# Altium PCB Handheld_REV1.PcbDoc (part 2 of 2)
Units mm, origin at the board's own origin, x right, y up, seen from the top; angles counter-clockwise.
Board outline 85 x 55 mm, 4 copper layers (Top Layer, Mid-Layer 1, Mid-Layer 2, Bottom Layer); 260 components, 237 nets, 1189 pads, 85 vias.
Unrouted connection lines stored in the file: 656.
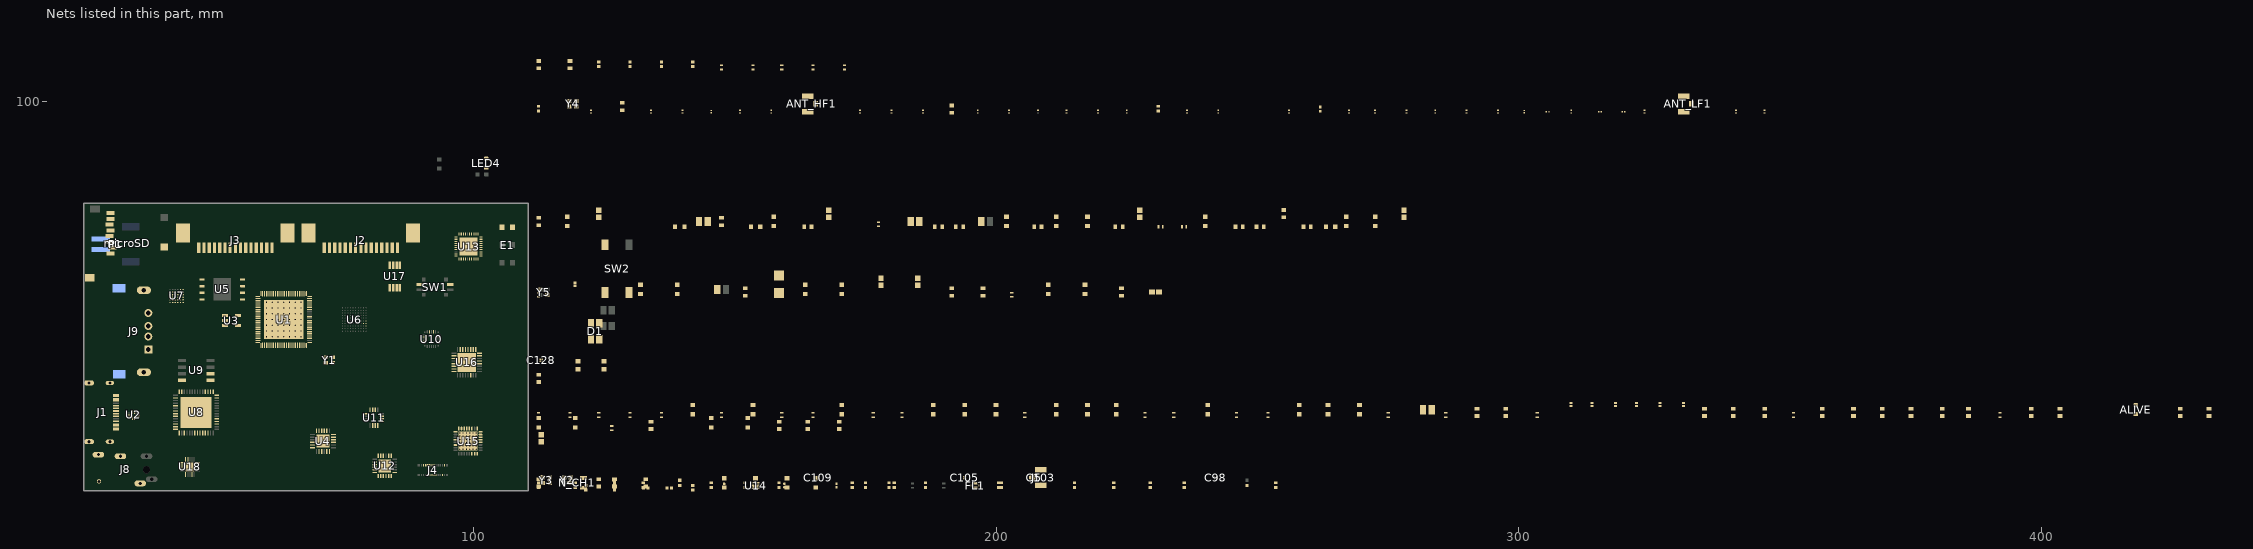
[diagram p4: the nets of this part, all layers, seen from the top]

## Footprints (in the part's own frame and the unit in brackets; to place one, negate y for a bottom-side part, rotate by r counter-clockwise, add the part's x,y. Pads: shape width x height; smd on the part's side, far side on the other; paste and mask are expansions set on the pad) (continued)
SON127P600X800X80-9N [mm]
  rrect25% 0.94x0.44 smd: 1(-3.895,1.905) 2(-3.895,0.635) 3(-3.895,-0.635) 4(-3.895,-1.905) 5(3.895,-1.905) 6(3.895,-0.635) 7(3.895,0.635) 8(3.895,1.905)
  rect 3.4x4.3 smd paste-3: 9(0,0)
  silkscreen extent -5.1,-3 4,3, body extent -4,-3 4,3, height 0.8
SOP65P490X110-8N [mm]
  rrect25% 1.47x0.48 smd: 1(-2.15,0.975) 2(-2.15,0.325) 3(-2.15,-0.325) 4(-2.15,-0.975) 5(2.15,-0.975) 6(2.15,-0.325) 7(2.15,0.325) 8(2.15,0.975)
  silkscreen extent -3.62,-1.54 1.5,1.54, body extent -2.45,-1.5 2.45,1.5, height 1.1
SOT95P280X145-5N [mm]
  rrect50% 1.21x0.59 smd: 1(-1.255,0.95) 2(-1.255,0) 3(-1.255,-0.95) 4(1.255,-0.95) 5(1.255,0.95)
  silkscreen extent -2.51,-1.45 0.8,1.45, body extent -1.4,-1.45 1.4,1.45, height 1.45
TDK_DPX165950DT-8148A1 [mm]
  rrect33% 0.6x0.3 smd: 1(-0.45,0.55) 2(-0.45,0) 3(-0.45,-0.55) 4(0.45,-0.55) 5(0.45,0) 6(0.45,0.55)
  silkscreen extent -0.4,1 -0.1,1.2, body extent -0.47,-0.88 0.48,0.87, height 0.7
"TE connectivity part no. 2-1437565-8" [mm] "Tactile switch (pushbutton)"
  rect 1.3x2.1 smd: 1(-2.3,4.55) 2(-2.3,-4.55) 3(2.3,4.55) 4(2.3,-4.55)
  body extent -3.05,-4.5 2.95,4.5, height 4.3
TE_1-84952-5 [mm]
  rect 0.61x2 smd: 1(-7,0) 2(-6,0) 3(-5,0) 4(-4,0) 5(-3,0) 6(-2,0) 7(-1,0) 8(0,0) 9(1,0) 10(2,0) 11(3,0) 12(4,0) 13(5,0) 14(6,0) 15(7,0)
  rect 2.68x3.6 smd: S1(-9.99,-2.8) S2(9.99,-2.8)
  silkscreen extent -11.46,-6.4 11.46,0.27, body extent -11.46,-5.6 11.46,0.94, height 2.54
TENSILITY_54-00176 [mm]
  oval 1.108x2.216 hole 0.6 square: 1(2.9,-4.7) 3(2.6,-0.5) 4(-2.6,3.3) 5(-1.8,5.5) 6(2.6,4.5)
  round 0.8 hole 0.6 mask+0: 2(-2.2,-4.6)
  round 1.4 hole 1.4 unplated: ""(0,4.5)
  Top Layer region: -1.89,-3.751 -1.884,-3.751 -1.879,-3.752 -1.874,-3.753 -1.869,-3.755 -1.864,-3.757 -1.859,-3.759 -1.855,-3.761 -1.85,-3.763 -1.846,-3.766 -1.841,-3.769 -1.837,-3.772 -1.833,-3.776 -1.829,-3.779 -1.826,-3.783 -1.822,-3.787 -1.819,-3.791 -1.816,-3.796 -1.813,-3.8 -1.811,-3.805 -1.809,-3.809 -1.807,-3.814 -1.805,-3.819 -1.803,-3.824 -1.802,-3.829 -1.801,-3.834 -1.801,-3.84 -1.8,-3.845 -1.8,-3.85 -1.8,-5.35 -1.8,-5.355 -1.801,-5.36 -1.801,-5.366 -1.802,-5.371 -1.803,-5.376 -1.805,-5.381 -1.807,-5.386 -1.809,-5.391 -1.811,-5.395 -1.813,-5.4 -1.816,-5.404 -1.819,-5.409 -1.822,-5.413 -1.826,-5.417 -1.829,-5.421 -1.833,-5.424 -1.837,-5.428 -1.841,-5.431 -1.846,-5.434 -1.85,-5.437 -1.855,-5.439 -1.859,-5.441 -1.864,-5.443 -1.869,-5.445 -1.874,-5.447 -1.879,-5.448 -1.884,-5.449 -1.89,-5.449 -1.895,-5.45 -2.505,-5.45 -2.51,-5.449 -2.516,-5.449 -2.521,-5.448 -2.526,-5.447 -2.531,-5.445 -2.536,-5.443 -2.541,-5.441 -2.545,-5.439 -2.55,-5.437 -2.554,-5.434 -2.559,-5.431 -2.563,-5.428 -2.567,-5.424 -2.571,-5.421 -2.574,-5.417 -2.578,-5.413 -2.581,-5.409 -2.584,-5.404 -2.587,-5.4 -2.589,-5.395 -2.591,-5.391 -2.593,-5.386 -2.595,-5.381 -2.597,-5.376 -2.598,-5.371 -2.599,-5.366 -2.599,-5.36 -2.6,-5.355 -2.6,-5.35 -2.6,-3.85 -2.6,-3.845 -2.599,-3.84 -2.599,-3.834 -2.598,-3.829 -2.597,-3.824 -2.595,-3.819 -2.593,-3.814 -2.591,-3.809 -2.589,-3.805 -2.587,-3.8 -2.584,-3.796 -2.581,-3.791 -2.578,-3.787 -2.574,-3.783 -2.571,-3.779 -2.567,-3.776 -2.563,-3.772 -2.559,-3.769 -2.554,-3.766 -2.55,-3.763 -2.545,-3.761 -2.541,-3.759 -2.536,-3.757 -2.531,-3.755 -2.526,-3.753 -2.521,-3.752 -2.516,-3.751 -2.51,-3.751 -2.505,-3.75 -1.895,-3.75
  Bottom Layer region: -1.89,-3.751 -1.884,-3.751 -1.879,-3.752 -1.874,-3.753 -1.869,-3.755 -1.864,-3.757 -1.859,-3.759 -1.855,-3.761 -1.85,-3.763 -1.846,-3.766 -1.841,-3.769 -1.837,-3.772 -1.833,-3.776 -1.829,-3.779 -1.826,-3.783 -1.822,-3.787 -1.819,-3.791 -1.816,-3.796 -1.813,-3.8 -1.811,-3.805 -1.809,-3.809 -1.807,-3.814 -1.805,-3.819 -1.803,-3.824 -1.802,-3.829 -1.801,-3.834 -1.801,-3.84 -1.8,-3.845 -1.8,-3.85 -1.8,-5.35 -1.8,-5.355 -1.801,-5.36 -1.801,-5.366 -1.802,-5.371 -1.803,-5.376 -1.805,-5.381 -1.807,-5.386 -1.809,-5.391 -1.811,-5.395 -1.813,-5.4 -1.816,-5.404 -1.819,-5.409 -1.822,-5.413 -1.826,-5.417 -1.829,-5.421 -1.833,-5.424 -1.837,-5.428 -1.841,-5.431 -1.846,-5.434 -1.85,-5.437 -1.855,-5.439 -1.859,-5.441 -1.864,-5.443 -1.869,-5.445 -1.874,-5.447 -1.879,-5.448 -1.884,-5.449 -1.89,-5.449 -1.895,-5.45 -2.505,-5.45 -2.51,-5.449 -2.516,-5.449 -2.521,-5.448 -2.526,-5.447 -2.531,-5.445 -2.536,-5.443 -2.541,-5.441 -2.545,-5.439 -2.55,-5.437 -2.554,-5.434 -2.559,-5.431 -2.563,-5.428 -2.567,-5.424 -2.571,-5.421 -2.574,-5.417 -2.578,-5.413 -2.581,-5.409 -2.584,-5.404 -2.587,-5.4 -2.589,-5.395 -2.591,-5.391 -2.593,-5.386 -2.595,-5.381 -2.597,-5.376 -2.598,-5.371 -2.599,-5.366 -2.599,-5.36 -2.6,-5.355 -2.6,-5.35 -2.6,-3.85 -2.6,-3.845 -2.599,-3.84 -2.599,-3.834 -2.598,-3.829 -2.597,-3.824 -2.595,-3.819 -2.593,-3.814 -2.591,-3.809 -2.589,-3.805 -2.587,-3.8 -2.584,-3.796 -2.581,-3.791 -2.578,-3.787 -2.574,-3.783 -2.571,-3.779 -2.567,-3.776 -2.563,-3.772 -2.559,-3.769 -2.554,-3.766 -2.55,-3.763 -2.545,-3.761 -2.541,-3.759 -2.536,-3.757 -2.531,-3.755 -2.526,-3.753 -2.521,-3.752 -2.516,-3.751 -2.51,-3.751 -2.505,-3.75 -1.895,-3.75
  Keep-Out Layer board cut-out: -1.65,-4.8 -1.65,-6 1.65,-6 1.65,-4.8
  silkscreen extent -3.15,-6 4.35,6, body extent -3.15,-8 3.15,6, height 4.35
"U.FL-R-SMT Hirose_2337019-1" [mm] "Hirose U.FL RF receptacle - U.FL-R-SMT"
  rect 1x0.95 smd paste+0 mask+0.025: 1(0,-1.5)
  rect 1.05x2.2 smd paste+0 mask+0.025: 2(1.475,0) 3(-1.475,0)
  Top Layer pour cut-out: -0.875,-0.9 -0.875,1.1 0.875,1.1 0.875,-0.9
  Mid-Layer 1 pour cut-out: -0.875,-0.9 -0.875,1.1 0.875,1.1 0.875,-0.9
  Mid-Layer 2 pour cut-out: -0.875,-0.9 -0.875,1.1 0.875,1.1 0.875,-0.9
  silkscreen extent -0.9,-1.9 -0.7,-1.7, body extent -1.5,-1.55 1.5,1.55, height 1.2
VFQFPN32_5X5_WETTABLE_STM-M [mil]
  rect 36x10 smd paste+0 mask+0: 1(-96.5,68.9) 2(-96.5,49.21) 3(-96.5,29.53) 4(-96.5,9.84) 5(-96.5,-9.84) 6(-96.5,-29.53) 7(-96.5,-49.21) 8(-96.5,-68.9) 17(96.5,-68.9) 18(96.5,-49.21) 19(96.5,-29.53) 20(96.5,-9.84) 21(96.5,9.84) 22(96.5,29.53) 23(96.5,49.21) 24(96.5,68.9)
  rect 10x36 smd paste+0 mask+0: 9(-68.9,-96.5) 10(-49.21,-96.5) 11(-29.53,-96.5) 12(-9.84,-96.5) 13(9.84,-96.5) 14(29.53,-96.5) 15(49.21,-96.5) 16(68.9,-96.5) 25(68.9,96.5) 26(49.21,96.5) 27(29.53,96.5) 28(9.84,96.5) 29(-9.84,96.5) 30(-29.53,96.5) 31(-49.21,96.5) 32(-68.9,96.5)
  rect 142x142 smd paste-71 mask+0: 33(0,0)
  silkscreen extent -104,-134 134,134, body extent -99,-99 99,99, height 39
VQFN-56Y856_FTD-M [mil]
  rect 36x10 smd paste+0 mask+0: 1(-155.5,127.95) 2(-155.5,108.27) 3(-155.5,88.58) 4(-155.5,68.9) 5(-155.5,49.21) 6(-155.5,29.53) 7(-155.5,9.84) 8(-155.5,-9.84) 9(-155.5,-29.53) 10(-155.5,-49.21) 11(-155.5,-68.9) 12(-155.5,-88.58) 13(-155.5,-108.27) 14(-155.5,-127.95) 29(155.5,-127.95) 30(155.5,-108.27) 31(155.5,-88.58) 32(155.5,-68.9) 33(155.5,-49.21) 34(155.5,-29.53) 35(155.5,-9.84) 36(155.5,9.84) 37(155.5,29.53) 38(155.5,49.21) 39(155.5,68.9) 40(155.5,88.58) 41(155.5,108.27) 42(155.5,127.95)
  rect 10x36 smd paste+0 mask+0: 15(-127.95,-155.5) 16(-108.27,-155.5) 17(-88.58,-155.5) 18(-68.9,-155.5) 19(-49.21,-155.5) 20(-29.53,-155.5) 21(-9.84,-155.5) 22(9.84,-155.5) 23(29.53,-155.5) 24(49.21,-155.5) 25(68.9,-155.5) 26(88.58,-155.5) 27(108.27,-155.5) 28(127.95,-155.5) 43(127.95,155.5) 44(108.27,155.5) 45(88.58,155.5) 46(68.9,155.5) 47(49.21,155.5) 48(29.53,155.5) 49(9.84,155.5) 50(-9.84,155.5) 51(-29.53,155.5) 52(-49.21,155.5) 53(-68.9,155.5) 54(-88.58,155.5) 55(-108.27,155.5) 56(-127.95,155.5)
  rect 234x234 smd paste-117 mask+0: 57(0,0)
  silkscreen extent -194,-194 194,194, body extent -157,-157 157,157, height 35
WL-SFCW_1206 [mm] "SMT Full-color Chip LED Waterclear, body 3.20 x 1.60mm"
  rect 1.6x1.2 smd: 1(-1.5,0.8) 2(-1.5,-0.8) 3(1.5,-0.8) 4(1.5,0.8)
  silkscreen extent -2.85,-0.85 -2.65,-0.65, body extent -1.6,-0.8 1.6,0.8, height 0.7
XTAL_ECS-400-10-37B2-CKM-TR [mm]
  rect 0.85x0.75 smd: 1(-0.675,-0.525) 2(0.675,-0.525) 3(0.675,0.525) 4(-0.675,0.525)
  silkscreen extent -0.77,-1.62 -0.58,-1.43, body extent -1,-0.8 1,0.8, height 0.5

## Part data
ALIVE: library part CMP-004-00003-1, "0603LED-Green", Component Type=Standard, Design Item ID=CMP-001-C10-9, Pin Count=2, Source="Components - 10.10.25 - 00.17.SchLib"
ANT_HF1 ANT_LF1: "U.FL Hirose RF Connector", LatestRevisionDate="21-Feb-2012  -  Semtech"
C1 C3 C4 C9 C96 C122 C123: library part "CAP-47uF-6.3V 0805", "T529, Tantalum, Polymer Tantalum, Reduced Volume, 47 uF, 20%, 6.3 VDC, SMD, Polymer, Substrate, 150 mOhms, 2012, Height Max = 1mm", Manufacturer_Name=Kemet, Copyright="Copyright (C) 2025 Ultra Librarian. All rights reserved.", Datasheet=https://content.kemet.com/datasheets/KEM_T2076_T52X-530.pdf, Manufacturer_Part_Number=T529P476M006AAE150
C2 C8 C10: library part CMP-001-C31-8, "22pF, 10V, 1%, NP0, 0603"
C5 C11 C12 C13 C14 C15 C16 C18 C19 C25 C26 C31 C32 C33 C35 C36 C39 C42 C44 C52 C53 C54 C55 C114 C115 C117 C118 C119 C120 C124 C125 C126: library part CMP-001-B36-7, "10uF, 16V, 20%, X5R, 0603"
C6 C7 C116 C121: library part CMP-00017-A.2, "100nF 16V"
C17 C20 C21 C22 C23 C24 C27 C28 C29 C30 C34 C37 C38 C40 C41 C43 C45 C46 C47 C48 C49 C50 C51 C56 C57 C58 C59 C60 C61 C127: library part CMP-00017-A.2
C62 C63 C129 C130: library part CMP-00397-1, "6.8pF, 50V, 10%, 0402", Voltage Rating (DC)=50V
C64 C66 C71 C99 C101 C106 C111 C112: library part CMP-00396-1, "10pF, 50V, 10%, 0402", Voltage Rating (DC)=50V
C65: library part CMP-0064968-1, "CAP, CERM, 8.2 pF, 25 V,+/- 1.2%, C0G/NP0, 0201", Cap_Case=0201, Manufacturer=MuRata, PartNumber=GRM0335C1E8R2BA01D, TempCo=C0G/NP0, Tolerance_%=1.2%, Value1=Unknown, Value2=25V, ValueDisplayed=8.2pF, AEC Category=Q200, AEC Grade=N/A, AEC Qualified=N, Cap_F=8.2pF, ComponentLink1Description="Datasheet link", ComponentLink1URL=http://search.murata.co.jp/Ceramy/image/img/A01X/G101/ENG/GRM0335C1E8R2BA01-01.pdf, CompType=Capacitor, LatestRevisionDate=2017-06-05, MountType=SMT, PackageReference=0201, Polarized=N, Published=2008-06-19, Publisher="Texas Instruments", RoHS=Y, SizeArea_mm2=0.18, SizeAreaWB_mm2=2.08, SizeX_mm=0.6, SizeY_mm=0.3, SizeZ_mm=0.26, Supplier 1=Digi-Key, Supplier 2=Mouser, Supplier Part Number 1=GRM0335C1E8R2BA01D, Supplier Part Number 2=81-GRM0335C1E8R2BA1D, TaMax_C=125°C, TaMin_C=-55°C, Technology=Ceramic, U/M=EA, VDC_V=25V
C67 C68 C69 C70 C86 C95: library part CMP-001-P41-1, "2.2uF, 35V, 10%, 0402"
C72 C73 C74: library part CMP-00395-1, "3.9pF, 50V, 10%, 0402", Voltage Rating (DC)=50V
C75 C76 C77 C78 C79 C80 C81 C82 C83 C84 C85 C87 C88 C89 C90 C91 C92 C93 C94: "Capacitor SMD", LatestRevisionDate="05-oct-2007  -  Semtech", LatestRevisionNote="Re-released for DXP Platform.", Published=8-Jun-2000, Publisher="Altium Limited"
C97 C113: library part CMP-00399-1, "50V 33pF C0G ±1% 0402 Multilayer Ceramic Capacitors MLCC - SMD/SMT ROHS", Case/Package=0402, Max Operating Temperature=125°C, Min Operating Temperature=-55°C, Tolerance=1%, Voltage Rating=50V, Voltage Rating (DC)=50V
C98 C103 C105 C109 C128: library part LXRW0YV600, "Variable capacitor 30-60pF", Supplier Part Number 1=490-18379-1-ND, Supplier 1=DigiKey
C100 C104 C107 C110: library part CMP-001-O95-2, "100pF, 50V, Tolerance, Temperature, 0402"
C102 C108: library part CMP-00398-1, "Ceramic Capacitor, Multilayer, Ceramic, 50V, 1% +Tol, 1% -Tol, C0G, 30ppm/Cel TC, 0.00068uF, Surface Mount, 0402", Max Operating Temperature=125°C, Min Operating Temperature=-55°C, Tolerance=1%, Voltage Rating=50V, Voltage Rating (DC)=50V
D1: library part CMP-004-00000-1, "Led, Red/Green/Blue, 360Mcd/1Cd/350Mcd Rohs Compliant: Yes", Forward Current=100mA, Forward Voltage=2V, Max Operating Temperature=85°C, Max Reverse Voltage (DC)=5V, Min Operating Temperature=-40°C, Power Dissipation=65mW, Dominant Wavelength=525nm, Height=700µm, Length=3.2mm, Luminous Intensity=350mcd, Peak Wavelength=468nm, RoHS=Compliant, Viewing Angle=120°, Width=1.6mm
D2: library part CMP-001-M81-1, "1206 RGB LED Wurth"
D3 D4 D5 D6 D7 D8 D12 D13 D14: "TVS DIODE 3.3V, DFN1006-2, 13pF @ 1MHz", Manufacturer_Name="Diodes Inc", Copyright="Copyright (C) 2025 Ultra Librarian. All rights reserved.", Manufacturer_Part_Number=DESD3V3E1BL-7B, RefDes=RefDes, Type=Type
D9 D10: "Ultra Low Capacitance 1-line ESD Protection", LatestRevisionDate=23-Aug-2016, Type="TVS Diode"
E1: library part CMP-0001857-1, "WLAN ANTENNA 802.11, SMD", Alternate Manufacturer=----, Manufacturer=Ethertronics, Alternate PartNumber=----, ComponentLink1Description="Datasheet URL", ComponentLink1URL=http://www.ethertronics.com/files/6014/0708/4228/Savvi_WLAN__8x3_M830510.pdf, CompType=Antenna, LatestRevisionDate=09/03/2017, MountType=SMT, PackageReference=8x3mm, PartNumber=M830520, Publisher="Texas Instruments", RoHS=Y, SizeArea_mm2=24, SizeAreaWB_mm2=50, SizeX_mm=3, SizeY_mm=8, SizeZ_mm=1.33
FB1: library part CMP-001-N50.0.3, "Ferrite Bead, 26 Ohm @ 100 MHz, 6A, 7mOhm", Case Code=0603, Current Rating=6A, DC Resistance-Max=7mR, Max Frequency=100MHz, Max Operating Temperature=125°C, Min Operating Temperature=-55°C, Construction="Chip Bead", Filter Type="FERRITE CHIP", Height=0.5mm, JESD-609 Code=e3, Length=1.6mm, Material=Ferrite, Min Frequency=100MHz, Mount="Surface Mount", Number of Functions=1, Output Impedance=26R, Packaging="Tape and Reel", REACH SVHC=Yes, RoHS Compliant=Yes, Terminal Finish=Tin, Width=0.8mm
FL1: library part CMP-0091509-1, "2.45GHz Center Frequency Band Pass RF Filter (Radio Frequency) 100MHz Bandwidth 1.8dB 0603 (1608 Metric), 3 PC Pad", Digikey Part Number=445-175610-1-ND, Frequency_Fixed=2.45GHz, Manufacturer=TDK, Mouser Part Number=810-DEA162450BT1295A, Operating Temperature Range="-40°C to +85°C", AEC Qualified=No, Bandwidth=2400-2500MHz, ComponentLink1Description=Datasheet, ComponentLink1URL=https://product.tdk.com/info/en/documents/data_sheet/rf_bpf_dea162450bt-1295a1_en.pdf, Datasheet=https://product.tdk.com/info/en/documents/data_sheet/rf_bpf_dea162450bt-1295a1_en.pdf, Datasheet Path=datasheets/Filter-DEA162450BT-1295A1.pdf, Digikey Description="RF FILTER BAND PASS 2.45GHZ 0603", Filter Type="Band Pass", helpURL=https://upverter.com/upn/revision/67a1f53e71daea06/, Insertion Loss=1.95dB, Lead Free=Yes, Mouser Description="RF Filter Band Pass 2450MHz 2400MHz to 2500MHz 1.95dB 50Ohm SMD 4Pin 0603 T/R", PackageReference=SMT_FILTER_1MM60_0MM80, Part Number=DEA162450BT-1295A1, PartNumber=DEA162450BT-1295A1, RoHS=TRUE, SizeZ_mm=0.7mm
J1: library part USB-C, "USB Type C Receptacle for USB 2.0, SMT Type Mid Mount, 2.0mm Offset", Package=None, Supplier Part Number 1=2073-USB4520-03-0-ACT-ND, Availability="In Stock", Check_prices=https://www.snapeda.com/parts/USB4520-03-0-A/Global+Connector+Technology/view-part/?ref=eda, Component Type=Standard, Design Item ID=USB4520-03-0-A_REVA, MF="Global Connector Technology", MP=USB4520-03-0-A, Pin Count=16, Price=None, Purchase-URL=https://pricing.snapeda.com/search/part/USB4520-03-0-A/?ref=eda, SnapEDA_Link=https://www.snapeda.com/parts/USB4520-03-0-A/Global+Connector+Technology/view-part/?ref=snap, Source=USB4520-03-0-A_REVA.SchLib, Supplier 1=DigiKey
J2 J3: "Conn FPC Connector SKT 15 POS 1mm Solder RA SMD T/R", Package=None, Availability="In Stock", Check_prices=https://www.snapeda.com/parts/1-84952-5/TE+Connectivity+AMP+Connectors/view-part/?ref=eda, EU_RoHS_Compliance=Compliant, MF="TE Connectivity", MP=1-84952-5, Price=None, Purchase-URL=https://pricing.snapeda.com/search/part/1-84952-5/?ref=eda, SnapEDA_Link=https://www.snapeda.com/parts/1-84952-5/TE+Connectivity+AMP+Connectors/view-part/?ref=snap
J4: library part BM14B0.8-24DS-0.4V53, "BB Q10 keyboard connector", Manufacturer_Name=Hirose, Supplier Part Number 1=H122178CT-ND, Copyright="Copyright (C) 2025 Ultra Librarian. All rights reserved.", Manufacturer_Part_Number=BM14B(0.8)-24DS-0.4V(53), RefDes=RefDes, Supplier 1=DigiKey, Type="Arrays, Edge Type, Mezzanine (Board to Board)"
J5: library part CMP-0075320-1, "Receptacle, Ultra Miniature Coaxial, Male Pin, 50 ohm, SMT", Color=Beige, Manufacturer="Hirose Electric Co. Ltd.", PartNumber=U.FL-R-SMT-1(01), Supplier Part Number 1=H122041-ND, CNHeader=False, ComponentLink1Description="Datasheet URL", ComponentLink1URL=https://www.hirose.com/product/en/download_file/key_name/U.FL%2DR%2DSMT%2D1%2801%29/category/Drawing%20(2D)/doc_file_id/37625/?file_category_id=6&item_id=03310472201&is_series=, CompType=Receptacle, ContactFinish=Gold, CT=False, Gender=Female, LatestRevisionDate=2017-07-12, MountType=SMT, Orientation=Vertical, PackageReference="Ultra small CO-AX SMD", PinCount=3, Publisher="Texas Instruments", RoHS=Y, Supplier 1=Digi-Key, Supplier 2=Newark, Supplier 3=Mouser, Supplier Part Number 2=18K7517, Supplier Part Number 3=798-U.FL-R-SMT01
J8: library part 54-00176, "Connector, 4C audio jack, 3.5xL14 mm, thru hole, gold plated", Package=None, Check_prices=https://www.snapeda.com/parts/54-00176/Tensility/view-part/?ref=eda, MF="Tensility International Corp", MP=54-00176, SnapEDA_Link=https://www.snapeda.com/parts/54-00176/Tensility/view-part/?ref=snap, Supplier 1="Arrow Electronics", Supplier Part Number 1=54-00176
J9: "USB-A (USB TYPE-A) USB 2.0 Receptacle Connector 4 Position Board Edge, Cutout; Through Hole, Right Angle", Package=None, Check_prices=https://www.snapeda.com/parts/USB1015-GF-L-A/Global+Connector+Technology/view-part/?ref=eda, MF="Global Connector Technology", MP=USB1015-GF-L-A, SnapEDA_Link=https://www.snapeda.com/parts/USB1015-GF-L-A/Global+Connector+Technology/view-part/?ref=snap
L1: library part CMP-006-00001-1, "Inductor Power Chip Shielded Multi-Layer 2.2uH 30% 1MHz Ferrite 1.2A 0.138Ohm DCR 0806 T/R", Case Code (Imperial)=0806, Case Code (Metric)=2016, Current Rating=1.2A, DC Resistance (DCR)=138mΩ, Inductance Tolerance=30%, Manufacturer Lifecycle Status="IN PRODUCTION", Max Operating Temperature=125°C, Min Operating Temperature=-55°C, Self Resonant Frequency=40MHz, Test Frequency=1MHz, Case/Package=0806, Core Material=Ferrite, DC Current=1.2A, Depth=1.75mm, ESR=138mΩ, Height=900µm, Height - Seated (Max)=990.6µm, Lead Free="Lead Free", Length=2.0066mm, Lifecycle Status=Production, Max Current Rating=1.2A, Max DC Current=1.2A, Military Standard=Not, Mounting Technology="Surface Mount", Number of Circuits=1, Number of Terminals=2, Packaging="Cut Tape", Radiation Hardening=No, REACH SVHC=Yes, RMS Current (Irms)=1.2A, RoHS=Compliant, Schedule B="8504500000, 8504500000", Shielding=Yes, Termination=SMD/SMT, Tolerance=30%, Width=1.6mm
L2: library part "Inductor SMD 0.47uH", "Multilayer Type Inductor for Power Lines, 0806 (2016), 0.47μH, 30%, 0.022Ω, 4.8A, CIGT201610EHR47MNE", Case Code (Imperial)=0806, Case Code (Metric)=2016, Current Rating=1.1A, DC Resistance (DCR)=175mR, Inductance=4.7uH, Inductance Tolerance=30%, Max Operating Temperature=125°C, Min Operating Temperature=-40°C, Package Quantity=1, Self Resonant Frequency=20MHz, Supplier Part Number 1=1276-6902-1-ND, Test Frequency=1MHz, Case/Package=0806, Core Material=Ferrite, DC Current=1.1A, Depth=1.6mm, Height=0.9mm, Height - Seated (Max)=0.039inch, Lead Free="Lead Free", Length=2mm, Max DC Current=1.1A, Military Standard=Not, Mount="Surface Mount", Packaging="Tape and Reel", REACH SVHC="No SVHC", Shielding=Shielded, Supplier 1=DigiKey, Termination=SMD/SMT, Tolerance=30%, Width=1.6mm
L3 L22: library part "Inductor SMD 4.7uH 1.1A", "Multilayer Type Inductor for Power Lines, 0806 (2016), 4.7μH, 30%, 0.175Ω, 1.1A, LQM2MPN4R7NG0L", Case Code (Imperial)=0806, Case Code (Metric)=2016, Current Rating=1.1A, DC Resistance (DCR)=175mR, Inductance=4.7uH, Inductance Tolerance=30%, Max Operating Temperature=125°C, Min Operating Temperature=-40°C, Package Quantity=1, Self Resonant Frequency=20MHz, Supplier Part Number 1=LQM2MPN4R7NG0L, Test Frequency=1MHz, Case/Package=0806, Core Material=Ferrite, DC Current=1.1A, Depth=1.6mm, Height=0.9mm, Height - Seated (Max)=0.039inch, Lead Free="Lead Free", Length=2mm, Max DC Current=1.1A, Military Standard=Not, Mount="Surface Mount", Packaging="Tape and Reel", REACH SVHC="No SVHC", Shielding=Shielded, Supplier 1=Newark, Termination=SMD/SMT, Tolerance=30%, Width=1.6mm
L4: library part "Inductor SMD 2.2uH 1.2A", "Multilayer Type Inductor for Power Lines, 0806 (2016), 4.7μH, 30%, 0.175Ω, 1.1A, LQM2MPN2R2NG0L", Case Code (Imperial)=0806, Case Code (Metric)=2016, Current Rating=1.1A, DC Resistance (DCR)=175mR, Inductance=4.7uH, Inductance Tolerance=30%, Max Operating Temperature=125°C, Min Operating Temperature=-40°C, Package Quantity=1, Self Resonant Frequency=20MHz, Supplier Part Number 1=LQM2MPN2R2NG0L, Test Frequency=1MHz, Case/Package=0806, Core Material=Ferrite, DC Current=1.1A, Depth=1.6mm, Height=0.9mm, Height - Seated (Max)=0.039inch, Lead Free="Lead Free", Length=2mm, Max DC Current=1.1A, Military Standard=Not, Mount="Surface Mount", Packaging="Tape and Reel", REACH SVHC="No SVHC", Shielding=Shielded, Supplier 1=Avnet, Termination=SMD/SMT, Tolerance=30%, Width=1.6mm
L5 L6: library part "Inductor SMD 3.9nH", "3.9 nH Unshielded Multilayer Inductor 750 mA 140mOhm Max 0402 (1005 Metric)", Case Code (Imperial)=0806, Case Code (Metric)=2016, Current Rating=1.1A, DC Resistance (DCR)=175mR, Inductance=4.7uH, Inductance Tolerance=30%, Max Operating Temperature=125°C, Min Operating Temperature=-40°C, Package Quantity=1, Self Resonant Frequency=20MHz, Supplier Part Number 1=490-LQG15HS3N9B02DCT-ND, Test Frequency=1MHz, Case/Package=0806, Core Material=Ferrite, DC Current=1.1A, Depth=1.6mm, Height=0.9mm, Height - Seated (Max)=0.039inch, Lead Free="Lead Free", Length=2mm, Max DC Current=1.1A, Military Standard=Not, Mount="Surface Mount", Packaging="Tape and Reel", REACH SVHC="No SVHC", Shielding=Shielded, Supplier 1=DigiKey, Termination=SMD/SMT, Tolerance=30%, Width=1.6mm
L7 L8 L9 L10 L11 L12 L13 L15 L16 L17 L18 L19: library part Inductor, "Inductor", Code_IEC=1005, Code_JEITA=0402, LatestRevisionDate="15-Jun-2021 -  Semtech", LatestRevisionNote="Re-released for DXP Platform.", Published=15-Jun-2021, Publisher="Altium Limited"
L14: library part Inductor_DC-DC, "Inductor for DC-DC", Code_IEC=1005, Code_JEITA=0402, LatestRevisionDate="15-Jun-2021 -  Semtech", LatestRevisionNote="Re-released for DXP Platform.", Published=15-Jun-2021, Publisher="Altium Limited"
L20 L21: library part "Inductor SMD 270nH", "Multilayer Type Inductor for Power Lines, 0603, 270nH, 30%, 0.286Ω, 500mA, MLJ1608WR27JT000", Case Code (Imperial)=0806, Case Code (Metric)=2016, Current Rating=1.1A, DC Resistance (DCR)=175mR, Inductance=4.7uH, Inductance Tolerance=30%, Max Operating Temperature=125°C, Min Operating Temperature=-40°C, Package Quantity=1, Self Resonant Frequency=20MHz, Supplier Part Number 1=MLJ1608WR27JT000, Test Frequency=1MHz, Case/Package=0806, Core Material=Ferrite, DC Current=1.1A, Depth=1.6mm, Height=0.9mm, Height - Seated (Max)=0.039inch, Lead Free="Lead Free", Length=2mm, Max DC Current=1.1A, Military Standard=Not, Mount="Surface Mount", Packaging="Tape and Reel", REACH SVHC="No SVHC", Shielding=Shielded, Supplier 1=Newark, Termination=SMD/SMT, Tolerance=30%, Width=1.6mm
LED4 LED5: library part CMP-001-C10-9, "SMD LED 0603, Green"
LED6: library part CMP-001-I07-1, "SMD LED 0603, Yellow"
microSD: "wurth µSD connector"
N_CH1: library part CMP-001-Q89.0.1, "Small Signal Field-Effect Transistor, 7A I(D), 30V, 1-Element, N-Channel, Silicon, Metal-oxide Semiconductor FET", Moisture Sensitivity Level=1, Reach SVHC Compliant=Yes, RoHS Compliant=Yes
P1: library part CMP-005-000000-1, "Connector Header Surface Mount, Right Angle 2 position 0.079 (2.00mm)", Package=None, Check_prices=https://www.snapeda.com/parts/S2B-PH-SM4-TB/JST/view-part/?ref=eda, Design Item ID=S2B-PH-SM4-TB, MF="JST Sales", MP=S2B-PH-SM4-TB, SnapEDA_Link=https://www.snapeda.com/parts/S2B-PH-SM4-TB/JST/view-part/?ref=snap, Source=Handheld.SchLib
R1 R8: library part CMP-001-O90-1, "220K, 1%, 1/10W, 0603"
R2 R5 R9 R17 R18 R19 R20 R21 R22 R33 R34 R40 R48 R50: library part CMP-001-B87-6, "47K, 1%, 1/10W, 0603"
R3 R10 R14 R23 R24 R25 R41: library part CMP-001-B03-6, "1K2, 5%, 1/10W, 0603"
R4: library part CMP-001-B15-7, "100K, 1%, 1/10W, 0603", Case Code (Imperial)=0603, Case Code (Metric)=1608, Manufacturer=Panasonic, Manufacturer Part Number=ERJ-3EKF1003V, Max Operating Temperature=155°C, Max Power Dissipation=100mW, Min Operating Temperature=-55°C, Package Quantity=1, Resistance=100kR, Supplier Part Number=P100KHTR-ND, Temperature Coefficient=100ppm/°C, Tolerance=1%, Voltage Rating=75V, Case/Package=0603, Composition="Thick Film", Contact Plating=Tin, Depth=0.8mm, Features="Automotive AEC-Q200", Height=0.022inch, Lead Free="Lead Free", Length=1.6mm, Military Standard=Not, Mount="Surface Mount", Number of Pins=2, Number of Terminations=2, Packaging="Tape and Reel", Power Rating=100mW, Radiation Hardening=No, REACH SVHC="No SVHC", Supplier=Digi-Key, Termination=SMD/SMT, Voltage Rating (DC)=75V, Weight=7.1E-05oz, Width=0.8mm
R6 R15 R16: library part CMP-001-G92-A.2, "3K3, 5%, 1/10W, 0603"
R7: library part CMP-001-G12-A.2, "120K, 0.1%, 1/10W, 0603"
R11 R12 R13 R26 R27 R35 R36 R42 R43 R45 R46 R47 R51: library part CMP-001-C30-7, "33R, 1%, 1/10W, 0603", Case Code (Imperial)=0603, Case Code (Metric)=1608, Manufacturer=Panasonic, Manufacturer Part Number=ERJ-3EKF33R0V, Max Operating Temperature=155°C, Max Power Dissipation=100mW, Min Operating Temperature=-55°C, Package Quantity=1, Supplier Part Number=P33.0HCT-ND, Temperature Coefficient=100ppm/°C, Tolerance=1%, Voltage Rating=75V, Case/Package=0603, Composition="Thick Film", Contact Plating=Tin, Depth=0.8mm, Features="Automotive AEC-Q200", Height=0.022inch, Lead Free="Lead Free", Length=1.6mm, Military Standard=Not, Mount="Surface Mount", Number of Pins=2, Number of Terminations=2, Packaging="Tape and Reel", Power Rating=100mW, Radiation Hardening=No, REACH SVHC="No SVHC", Resistance=33R, Supplier=Digi-Key, Termination=SMD/SMT, Voltage Rating (DC)=75V, Width=0.031inch
R28 R29: library part CMP-001-E44-4, "No resistor, just the pad"
R30 R49: library part CMP-001-R11-1, "4K02, 1%, 1/10W, 0603"
R31 R32: library part CMP-0027008-4, "RES, 0, 5%, 0.05 W, 0201", Manufacturer=Vishay-Dale, Power_W=50mW, Supplier Part Number 1=72M6743, TempCo=ppm/C, Tolerance_%=5%, Value2=0.05W, Value_Code=0000, ValueDisplayed=0, AEC Category=Q200, AEC Grade=N/A, AEC Qualified=N, ComponentLink1Description="Datasheet link", ComponentLink1URL=http://www.vishay.com/docs/20052/crcw0201e3.pdf, CompType=Resistor, EIA_Code=E24, MountType=SMT, PackageReference=0201, PartNumber=CRCW02010000Z0ED, Res_ohm=0, RoHS=E, SizeArea_mm2=0.18, SizeX_mm=0.6, SizeY_mm=0.3, SizeZ_mm=0.26, Supplier 1=Newark, Technology="Thick Film", Value1=5%
R37 R38: library part CMP-001-R15-2, "1R5 1% 1/8W, 0402", Case/Package=0402, Max Power Dissipation=63mW, Temperature Coefficient=200ppm/°C, Tolerance=1%, Voltage Rating=50V, Mounting Technology="Surface Mount", Voltage Rating (DC)=50V
R39: library part CMP-00400-1, "100R 1% 1/8W, 0402", Case/Package=0402, Max Power Dissipation=63mW, Temperature Coefficient=100ppm/°C, Tolerance=1%, Voltage Rating=50V, Mounting Technology="Surface Mount", Voltage Rating (DC)=50V
R44: library part CMP-001-H36-A.1, "0R022, 2%, 1/2W, 1206"
SW1: library part CMP-001-L08-A.1, "SWITCH SLIDE DIP SPST 100MA 6V", Current Rating=100mA, Max Operating Temperature=85°C, Min Operating Temperature=-40°C, Voltage Rating (DC)=6V, Actuator Type="Slide (Standard)", Body Material=Polyphenylene, Contact Material="Stainless Steel", Contact Plating=Gold, Electrical Life=1000Cycles, Length=0.118inch, Mount="Surface Mount", Number of Positions=2, Packaging="Tape and Reel", Pitch=0.039inch, Termination="Gull Wing", Throw Configuration=SPST, Washable=No
SW2: library part CMP-001-E74-6, "Tactile Switch, 24V, 50 mA, Pushbutton - N.O, 2-1437565-8"
U1: library part ESP32-P4NRW32-R09.0.1, "RISC-V 32-bit dual-core 360MHz,  32MB PSRAM, 55xGPIO"
U2: "USB Switch IC 1 Channel 10-UQFN (1.8x1.4)", Package="UQFN-10 Diodes Inc.", Availability=Unavailable, MF="Diodes Inc.", MP=PI3USB42ZMEX, Price=None, SnapEDA_Link=https://www.snapeda.com/parts/PI3USB42ZMEX/Diodes%20Inc./view-part/1218281/?ref=snap
U3: "2.5V-5.5V input, 2-A high efficiency step-down buck converter in SOT23 and SOT563 package", Package="SOT-23-5 Texas Instruments", Supplier Part Number 1=296-47360-1-ND, Check_prices=https://www.snapeda.com/parts/TLV62569DBVR/Texas+Instruments/view-part/?ref=eda, MF="Texas Instruments", MP=TLV62569DBVR, SnapEDA_Link=https://www.snapeda.com/parts/TLV62569DBVR/Texas+Instruments/view-part/?ref=snap, Supplier 1=DigiKey, Supplier 2=Mouser, Supplier Part Number 2=445-SY20018IAAC
U4: library part LTC3521EUFPBF, "1A Buck-Boost DC/DC and Dual 600mA Buck DC/DC Converters", Manufacturer_Name="Analog Devices Inc", Copyright="Copyright (C) 2025 Ultra Librarian. All rights reserved.", Datasheet=https://www.analog.com/media/en/technical-documentation/data-sheets/3521fb.pdf, Manufacturer_Part_Number=LTC3521EUF#PBF, RefDes=RefDes, Type=Type
U5: "FLASH - NOR Memory IC 512Mb (64M x 8) SPI - Quad I/O 133 MHz 8-WSON (8x6)", Package=Package, Supplier Part Number 1=256-W25Q512JVEIQ-TUBE-ND, Check_prices=https://www.snapeda.com/parts/W25Q512JVEIQ/Winbond/view-part/?ref=eda, MF="Winbond Electronics", MP=W25Q512JVEIQ, SnapEDA_Link=https://www.snapeda.com/parts/W25Q512JVEIQ/Winbond/view-part/?ref=snap, Supplier 1=DigiKey
U6: library part CMP-001-0000-1, "FPGA Titan 61HSIO 3PLL 100BGA", PartId=1
U7: "AccuCharge + ModelGauge 1-Cell Fuel Gauge and 3A Charger with Integrated USB Type-C Detection", Manufacturer_Name="Analog Devices Inc", Copyright="Copyright (C) 2025 Ultra Librarian. All rights reserved.", Manufacturer_Part_Number=MAX77972EWX+, RefDes=RefDes, Type=Type
U8: library part CMP-001-0004-2, "Usb Hi-speed to Quad Channel Serial UART/JTAG/SPI/I2C IC, QFN-56", Case/Package=VQFN, Clock Frequency=12MHz, Max Operating Temperature=85°C, Max Supply Voltage=1.98V, Min Operating Temperature=-40°C, Min Supply Voltage=1.62V, Operating Supply Voltage=1.8V, Data Rate=1.5Mbps, Height - Seated (Max)=1mm, Interface="I2C, RS-232, RS-422, RS-485, SPI, UART, USB", Length=8mm, Lifecycle Status=Production, Number of I/Os=4, Number of Terminals=56, Packaging="Cut Tape", Pins=64, REACH SVHC=Yes, RoHS=Compliant, Terminal Pitch=500µm, Width=8mm
U9: library part CMP-031-000000-1, "IC EEPROM 4KBIT I2C 1MHZ 8SOIC", Manufacturer=STMicroelectronics, Manufacturer Part Number=M24C04-DRMN3TP/K, Component Type=EEPROM, Design Item ID=CMP-001-O78.0.1, Pin Count=8, Source="Components - 10.10.25 - 00.26.2.SchLib"
U10: library part TPS22993, "IC PWR SWITCH N-CHAN 1:1 20WQFN", Case/Package=WFQFN, Max Operating Temperature=85°C, Max Output Current=1.2A, Min Operating Temperature=-40°C, Supplier Part Number 1=296-51869-1-ND, Interface=I2C, Lead Free="Lead Free", Number of Channels=4, Number of Outputs=4, Output Configuration="High Side", Packaging="Tape and Reel", RoHS Compliant=Yes, Supplier 1=DigiKey
U11: "8-Channel, 12-Bit, Configurable ADC/DAC with On-Chip Reference, I2C Interface", Manufacturer_Name="Analog Devices Inc", Copyright="Copyright (C) 2025 Ultra Librarian. All rights reserved.", Datasheet=https://www.analog.com/media/en/technical-documentation/data-sheets/AD5593R.pdf, Manufacturer_Part_Number=AD5593RBCPZ-RL7, RefDes=RefDes, Type=Type
U12: "I2C Controlled Keypad Scan IC With Integrated ESD Protection 24-WQFN -40 to 85", Package="WQFN-24 Texas Instruments", Check_prices=https://www.snapeda.com/parts/TCA8418RTWR/Texas%20Instruments/view-part/229165/?ref=eda, Digi-Key_Part_Number=296-25223-1-ND, MF="Texas Instruments", MP=TCA8418RTWR, Purchase-URL=https://pricing.snapeda.com/search/part/TCA8418RTWR/?ref=eda, SnapEDA_Link=https://www.snapeda.com/parts/TCA8418RTWR/Texas%20Instruments/view-part/229165/?ref=snap
U13: "Wi-Fi 6 (802.11ax)  Bluetooth Low Energy 5.4 in CC33x1 devices  Companion IC to any processor or MCU host capable of running a TCP/IP stack  Integrated 2.4GHz and 5GHz PA for complete wireless solution with up to +20.5dBm output power.  Operating temperature: 40C to +105C  Application throughput up to 50Mbps", Manufacturer_Name="Texas Instruments", Mouser Part Number=595-CC3351ENJARSBR, Arrow Part Number=CC3351ENJARSBR, Arrow Price/Stock=https://www.arrow.com/en/products/cc3351enjarsbr/texas-instruments?utm_currency=USD&region=nac, Datasheet Link=https://www.ti.com/lit/ds/symlink/cc3351.pdf?ts=1729762003874&ref_url=https%253A%252F%252Fwww.ti.com%252F, Geometry.Height=0.8mm, Manufacturer_Part_Number=CC3351ENJARSBR, Mouser Price/Stock=https://www.mouser.co.uk/ProductDetail/Texas-Instruments/CC3351ENJARSBR?qs=iLKYxzqNS77FIPECga1PlQ%3D%3D
U14: "Multilayer Diplexer for 2.4GHz W-LAN & Bluetooth / 5GHz W-LAN", Alternate Manufacturer=----, Manufacturer=TDK, PartNumber=DPX165950DT-8148A1, Supplier Part Number 1=445-174759-1-ND, Alternate PartNumber=----, ComponentLink1Description="Datasheet URL", ComponentLink1URL=https://sps06.itg.ti.com/sites/KMS/crossdivteams/altium/docs/ComponentDatasheets/DPX165950DT-8148A1.pdf, CompType=Diplexer, LatestRevisionDate=09/03/2017, MountType=SMT, PackageReference=1.6x0.8mm, Publisher="Texas Instruments", RoHS=Y, SizeArea_mm2=1.28, SizeAreaWB_mm2=4.68, SizeX_mm=0.8, SizeY_mm=1.6, SizeZ_mm=0.7, Supplier 1=Digi-Key, Supplier 2=Mouser, Supplier Part Number 2=810-DPX16595DT8148A1
U15: "LR2021 - Low Power Integrated Low Power Multi protocol Transceiver", LatestRevisionDate="27-Jul-2009 -  Semtech"
U16: "NFC reader for payment, consumer and industrial", Manufacturer_Name=STMicroelectronics, Copyright="Copyright (C) 2025 Ultra Librarian. All rights reserved.", Manufacturer_Part_Number=ST25R3916B-AQWT, RefDes=RefDes, Type="RFID, RF Access, Monitoring ICs"
U17: "2-bit level-translating 1-MHz I2C/SMBus buffer/repeater with powered-off high-impedance", Package="VSSOP-8 Texas Instruments", Check_prices=https://www.snapeda.com/parts/TCA9617BDGKR/Texas+Instruments/view-part/?ref=eda, MF="Texas Instruments", MP=TCA9617BDGKR, SnapEDA_Link=https://www.snapeda.com/parts/TCA9617BDGKR/Texas+Instruments/view-part/?ref=snap, Supplier 1="Arrow Electronics", Supplier Part Number 1=TCA9617BDGKR
U18: "IC AUDIO CODEC STEREO 20-QFN", Manufacturer_Name=NXP, Copyright="Copyright (C) 2025 Ultra Librarian. All rights reserved.", Manufacturer_Part_Number=SGTL5000XNLA3, RefDes=RefDes, Supplier 1=Newark, Supplier Part Number 1=SGTL5000XNLA3, Type=Type
Y1: library part ECS-400-10-37B2-CKM-TR, "Crystal 40MHz ±10ppm (Tol) ±10ppm (Stability) 10pF FUND 40Ohm 4-Pin Mini-CSMD T/R", Package="ECX-1637B-37B-4 ECS", Check_prices=https://www.snapeda.com/parts/ECS-400-10-37B2-CKM-TR/ECS+Inc./view-part/?ref=eda, MF="ECS Inc.", MP=ECS-400-10-37B2-CKM-TR, SnapEDA_Link=https://www.snapeda.com/parts/ECS-400-10-37B2-CKM-TR/ECS+Inc./view-part/?ref=snap
Y2: library part CMP-0094366-1, "32.768 kHz XO (Standard) CMOS Oscillator 1.8V Enable/Disable 4-SMD, No Lead", Digikey Part Number=1923-1619-1-ND, Frequency Stability=100ppm, Frequency_Fixed=32.768kHz, Load Capacitance=15pF, Manufacturer="IQD Frequency Products", Max Supply Current=0.2mA, Max Supply Voltage=1.89V, Min Supply Voltage=1.71V, Mouser Part Number=449-LFSPXO073707REEL, Operating Temperature Range="-40°C to +125°C", AEC Qualified=No, ComponentLink1Description=Datasheet, ComponentLink1URL=https://www.iqdfrequencyproducts.com/products/pn/LFSPXO073707Reel.pdf, Datasheet=https://www.iqdfrequencyproducts.com/products/pn/LFSPXO073707Reel.pdf, Datasheet Path=datasheets/Crys-LFSPXO073707REEL.pdf, Digikey Description="XTAL OSC XO 32.7680KHZ CMOS SMD", helpURL=https://upverter.com/upn/revision/c85886b3b224eb15/, Lead Free=Yes, PackageReference=SMT4_2MM0_1MM6, Part Number=LFSPXO073707REEL, PartNumber=LFSPXO073707REEL, RoHS=TRUE, Series=IQXO-404, SizeZ_mm=0.8mm, Supplier 1=Digikey, Supplier 2=Mouser, Supplier Part Number 1=1923-1619-1-ND, Supplier Part Number 2=449-LFSPXO073707REEL
Y3: "Crystal 40MHz ±10ppm (Tol) ±10ppm (Stability) 10pF FUND 40Ohm 4-Pin Mini-CSMD T/R", Package="ECX-1637B-37B-4 ECS", Check_prices=https://www.snapeda.com/parts/ECS-400-10-37B2-CKM-TR/ECS+Inc./view-part/?ref=eda, MF="ECS Inc.", MP=ECS-400-10-37B2-CKM-TR, SnapEDA_Link=https://www.snapeda.com/parts/ECS-400-10-37B2-CKM-TR/ECS+Inc./view-part/?ref=snap
Y4: library part ECSTXO20CSMV320EYTR, "32 MHz TCXO Clipped Sine Wave Oscillator 1.7V ~ 3.465V - 4-SMD, No Lead", Package="ECS-TXO-20CSMV-0-4 ECS", Supplier Part Number 1=50-ECS-TXO-20CSMV-320-EY-CT-ND, Check_prices=https://www.snapeda.com/parts/ECS-TXO-20CSMV-320-EY-TR/ECS/view-part/?ref=eda, MF="ECS Inc.", MP=ECS-TXO-20CSMV-320-EY-TR, SnapEDA_Link=https://www.snapeda.com/parts/ECS-TXO-20CSMV-320-EY-TR/ECS/view-part/?ref=snap, Supplier 1=DigiKey
Y5: library part ECS-271.2-10-37-CKM-TR, "Crystal 27.12MHz ±10ppm (Tol) ±10ppm (Stability) 10pF FUND 60Ohm 4-Pin Mini-CSMD T/R", Package="ECX-1637B-37B-4 ECS", Supplier Part Number 1=XC2511CT-ND, Check_prices=https://www.snapeda.com/parts/ECS-400-10-37B2-CKM-TR/ECS+Inc./view-part/?ref=eda, MF="ECS Inc.", MP=ECS-400-10-37B2-CKM-TR, SnapEDA_Link=https://www.snapeda.com/parts/ECS-400-10-37B2-CKM-TR/ECS+Inc./view-part/?ref=snap, Supplier 1=DigiKey

## Via types
v1: diameter 0.5, hole 0.2, Top Layer to Bottom Layer, 49 vias
v2: diameter 0.4, hole 0.2, Top Layer to Bottom Layer, tented top, 36 vias

## Nets (pads, with @x,y where several pads share a name; then routed paths per layer and width w, separated by ;. In a path a pad name is that pad's centre, name@x,y a point inside that pad or via, vN(x,y) a via of type N, cw(c..) or ccw(c..) an arc to the next point about the centre after c; other vN are vias at no path point)
0V9: C5.2 C9.1 C10.2 C16.2 L4.2 R7.2
1V8: C4.1 C8.2 C14.2 C15.2 C57.2 C58.2 C59.2 C60.2 C61.2 C124.2 C125.2 C127.2 L3.2 R4.2 U1.21 U1.96 U10.2 U13.4 U13.5 U13.17 U13.32 U13.35 U17.1 Y2.4
1V8_FTDI: C53.2 U8.2 U8.31 U8.43
3V3: C1.1 C2.2 C11.2 C17.2 C21.2 C23.2 C25.2 C36.2 C37.2 C38.2 C39.2 C45.2 C46.2 C47.2 C48.2 C49.2 C52.2 C54.2 C55.2 C67.2 C68.2 C122.1 C123.1 C126.2 J2.15 J3.14 J3.15 microSD.4 R1.2 R9.1 R10.2 R14.2 R15.2 R16.2 R41.2 R48.2 R50.1 U1.9 U1.51 U1.62 U1.75 U1.77 U1.101 U1.102 U2.9 U3.4 U4.16 U8.5 U8.9 U8.44 U10.4 U10.14 U13.39 U13.40 U17.8
5V: J9.1
AAT_P: C98.2 C105.2 C109.2 U16.19
AAT_S: C103.2 C128.2 U16.18
BLE_UART_CTS: U1.95 U13.12
BLE_UART_RTS: U1.94 U13.11
BLE_UART_RX: U1.93 U13.13
BLE_UART_TX: U1.92 U13.14
CAM_IO_RESET: J2.11 R47.2
CAM_IO_STROBE: J2.12
DATAMUX: C121.2 D12.1 SW2.4 U7.B3
Debug_USB_DM: R12.1 U2.4
Debug_USB_DP: R11.1 U2.5
ESP32_EN: U1.103 U8.26
ESP32_SCL: J2.13 J3.11 U17.6
ESP32_SCL_1V8: U1.97 U17.2
ESP32_SDA: J2.14 J3.12 U17.7
ESP32_SDA_1V8: U1.98 U17.3
ESP_USB_DBG_N: U1.52
ESP_USB_DBG_P: U1.53
ESP_USBA_N: R13.1 U1.55
ESP_USBA_P: R51.1 U1.56
FPGA_QSPI_CS: U1.57
FPGA_QSPI_D0: U1.58
FPGA_QSPI_D1: U1.61
FPGA_QSPI_D2: U1.64
FPGA_QSPI_D3: U1.63
FPGA_QSPI_IQR: U1.65
FPGA_QSPI_SCLK: U1.60
GND: ANT_LF1.2 ANT_LF1.3 C1.2 C3.2 C4.2 C5.1 C6.1 C7.1 C9.2 C11.1 C12.1 C13.1 C14.1 C15.1 C16.1 C17.1 C18.1 C19.1 C20.1 C21.1 C22.1 C23.1 C24.1 C25.1 C26.1 C27.2 C28.2 C29.1 C30.1 C31.1 C32.1 C33.1 C34.1 C35.1 C36.1 C37.1 C38.1 C39.1 C40.1 C41.1 C42.1 C43.1 C44.1 C45.1 C46.1 C47.1 C48.1 C49.1 C52.1 C53.1 C54.1 C55.1 C57.1 C58.1 C59.1 C60.1 C61.1 C62.1 C63.1 C66.1 C67.1 C68.1 C69.1 C70.1 C71.1 C73.1 C74.1 C75.1 C78.1 C79.1 C80.1 C81.2 C83.1 C84.1 C86.2 C87.1 C89.1 C90.1 C91.1 C93.1 C94.1 C96.2 C98.1 C101.1 C102.1 C103.1 C104.1 C105.1 C107.2 C108.2 C109.1 C111.2 C114.1 C115.1 C117.1 C118.1 C119.1 C120.1 C121.1 C122.2 C123.2 C124.1 C125.1 C126.1 C127.1 C128.1 C129.1 C130.1 D3.2 D4.2 D5.2 D6.2 D7.2 D8.2 D9.1 D10.1 D12.2 D13.2 D14.2 E1.1 FL1.2 FL1.4 J1.A1_B12 J1.B1_A12 J1.S1 J1.S2 J1.S3 J1.S4 J2.1 J2.4 J2.7 J2.10 J2.S1 J2.S2 J3.1 J3.4 J3.7 J3.10 J3.13 J3.S1 J3.S2 J5.2@208.5,29.475 J5.3@208.5,26.525 J8.2 J9.4 J9.SH1 J9.SH2 J9.SH3 J9.SH4 L5.1 L6.1 L11.2 L18.2 microSD.6 microSD.9 N_CH1.2 P1.2 R3.2 R6.2 R8.1 R30.1 R33.2 R34.2 R40.1 R49.1 SW1.3 SW2.1 SW2.2 U1.105 U2.3 U3.2 U4.6 U4.12 U4.18 U4.21 U4.25 U5.4 U7.A6 U7.B5 U7.E1 U7.E2 U8.21 U8.41 U8.45 U8.57 U9.4 U11.12 U12.19 U12.25 U13.3 U13.16 U13.20 U13.25 U13.37 U13.41 U14.2 U14.4 U14.6 U15.0 U15.15 U15.30 U16.6 U16.12 U16.16 U16.20 U16.21 U16.26 U16.33 U17.4 U18.21 Y1.2 Y1.4 Y2.2 Y3.2 Y3.4 Y4.1 Y4.2
  other v1: 60.45,54.95 61.55,54.95 62.65,54.95 63.75,54.95 64.85,54.95 65.95,54.95 67.05,54.95 60.45,56.05 61.55,56.05 62.65,56.05 63.75,56.05 64.85,56.05 65.95,56.05 67.05,56.05 60.45,57.15 61.55,57.15 62.65,57.15 63.75,57.15 64.85,57.15 65.95,57.15 67.05,57.15 60.45,58.25 61.55,58.25 62.65,58.25 63.75,58.25 64.85,58.25 65.95,58.25 67.05,58.25 60.45,59.35 61.55,59.35 62.65,59.35 63.75,59.35 64.85,59.35 65.95,59.35 67.05,59.35 60.45,60.45 61.55,60.45 62.65,60.45 63.75,60.45 64.85,60.45 65.95,60.45 67.05,60.45 60.45,61.55 61.55,61.55 62.65,61.55 63.75,61.55 64.85,61.55 65.95,61.55 67.05,61.55
  other v2: 97.425,33.425 98.05,33.425 98.675,33.425 99.325,33.425 99.95,33.425 100.575,33.425 97.425,34.05 98.05,34.05 98.675,34.05 99.325,34.05 99.95,34.05 100.575,34.05 97.425,34.675 98.05,34.675 98.675,34.675 99.325,34.675 99.95,34.675 100.575,34.675 97.425,35.325 98.05,35.325 98.675,35.325 99.325,35.325 99.95,35.325 100.575,35.325 97.425,35.95 98.05,35.95 98.675,35.95 99.325,35.95 99.95,35.95 100.575,35.95 97.425,36.575 98.05,36.575 98.675,36.575 99.325,36.575 99.95,36.575 100.575,36.575
Hard_Reset_ALL: R45.1 R46.1 R47.1 U11.10
HFXT_M: C130.2 U13.6 Y3.3
HFXT_P: R35.2 U13.7
HOST_IRQ_BLE: U1.25 U13.30
HOST_IRQ_WL: U1.24 U13.29
HP_CORE_1V1: C24.2 C26.2 C27.1 C28.1 C32.2 C33.2 L1.2 R28.2 R29.1 U1.26 U1.76 U1.91
I2S_DIN: U18.17
I2S_DOUT: U18.16
I2S_LRCLK: U18.14
I2S_SCLK: U18.15
KEY_nIQR: U1.12 U12.24
LB_DPX_In: C64.2 C71.2 U14.1
LJOY_VRx: U11.4
LJOY_VRy: U11.5
Mic: J8.1 U18.10
Mic_BB: J4.3
MIPI_2V5: C40.2 C41.2 C42.2 U1.41 U1.73
MTCK: U1.2 U8.22
MTDI: U1.3 U8.23
MTDO: U1.5 U8.24
MTMS: U1.4 U8.25
NetAE1_1: R38.2
NetALIVE_1: ALIVE.1 R14.1
NetALIVE_2: ALIVE.2 U1.104
NetANT_HF1_1: ANT_HF1.1 C90.2 C91.2 D10.2 L17.2 L18.1
NetANT_HF1_2: ANT_HF1.2 ANT_HF1.3
NetANT_LF1_1: ANT_LF1.1 C76.2 C80.2 C81.1 D9.2 L10.2 L11.1
NetC2_1: C2.1 R1.1 R2.2 U4.8
NetC8_1: C8.1 R4.1 R5.1 U4.24
NetC10_1: C10.1 R7.1 R8.2 U4.23
NetC19_2: C19.2 C114.2 C115.2 U7.C1 U7.C2
NetC62_2: C62.2 U1.100 Y1.1
NetC63_2: C63.2 U1.99 Y1.3
NetC64_1: C64.1 C66.2 FL1.3
NetC65_1: C65.1 E1.6 L6.2
NetC65_2: C65.2 L5.2 R32.2
NetC69_2: C69.2 U13.1
NetC70_2: C70.2 U13.31
NetC72_1: C72.1 C74.2 U14.3
NetC75_2: C75.2 C76.1 L7.2
NetC77_1: C77.1 L9.2
NetC77_2: C77.2 C78.2 C82.1 L8.1
NetC79_2: C79.2 C82.2 L8.2 L10.1
NetC85_1: C85.1 C88.2 C89.2 L16.1
NetC85_2: C85.2 C87.2 C92.2 L16.2
NetC88_1: C88.1 L15.2
NetC92_1: C92.1 C94.2 L19.1
NetC93_2: C93.2 L14.2 U15.14
NetC95_1: C95.1 Y4.3
NetC95_2: C95.2 R36.2
NetC97_1: C97.1 C102.2 C103.3 L20.2
NetC97_2: C97.2 C98.3 C99.2 C100.2 C101.2 C103.4 R37.1
NetC98_4: C98.4 C106.2
NetC100_1: C100.1 C105.3
NetC105_4: C105.4 C110.2
NetC106_1: C106.1 C109.3
NetC108_1: C108.1 C113.1 C128.4 L21.2
NetC109_4: C109.4 C110.1 C111.1 C112.1 C113.2 C128.3 R38.1
NetC116_1: C116.1 U7.D1 U7.D2 U7.D3
NetC116_2: C116.2 U7.F1
NetC119_2: C119.2 U7.F2
NetC120_2: C120.2 U7.A5
NetC129_2: C129.2 R35.1 Y3.1
NetD1_1: D1.1 R25.2
NetD1_3: D1.3 R24.2
NetD1_4: D1.4 R23.2
NetD11_3: R39.2
NetD13_1: D13.1 J9.3 R51.2
NetD14_1: D14.1 J9.2 R13.2
NetFB1_1: FB1.1 J1.A4_B9 J1.B4_A9
NetJ1_A5: J1.A5 U7.F3
NetJ1_B5: J1.B5 U7.F4
NetJ2_2: J2.2 U1.42
NetJ2_3: J2.3 U1.43
NetJ2_5: J2.5 U1.46
NetJ2_6: J2.6 U1.47
NetJ2_8: J2.8 U1.45
NetJ2_9: J2.9 U1.44
NetJ3_2: J3.2 U1.36
NetJ3_3: J3.3 U1.35
NetJ3_5: J3.5 U1.37
NetJ3_6: J3.6 U1.38
NetJ3_8: J3.8 U1.40
NetJ3_9: J3.9 U1.39
NetJ4_6: J4.6 U12.8
NetJ4_7: J4.7 U12.9
NetJ4_8: J4.8 U12.7
NetJ4_9: J4.9 U12.10
NetJ4_10: J4.10 U12.11
NetJ4_17: J4.17 U12.12
NetJ4_18: J4.18 U12.6
NetJ4_19: J4.19 U12.13
NetJ4_20: J4.20 U12.5
NetJ4_21: J4.21 U12.4
NetJ4_22: J4.22 U12.3
NetJ4_27: J4.27 U12.2
NetJ5_1: J5.1 R31.2
NetJ8_3: J8.3 U18.1
NetJ8_4: J8.4 U18.4
NetL1_1: L1.1 U3.3
NetL3_1: L3.1 U4.20
NetL4_1: L4.1 U4.17
NetL14_1: L14.1 U15.16
NetL22_1: L22.1 U4.15
NetLED4_1: LED4.1 R10.1
NetLED4_2: LED4.2 U4.4
NetN_CH1_1: N_CH1.1 R40.2 U16.17
NetN_CH1_3: N_CH1.3 R39.1
NetR2_1: R2.1 R3.1
NetR5_2: R5.2 R6.1
NetR9_2: R9.2 SW1.2 U2.10
NetR11_2: R11.2 U8.8
NetR12_2: R12.2 U8.7
NetR23_1: R23.1 U1.88
NetR24_1: R24.1 U1.89
NetR25_1: R25.1 U1.90
NetR26_1: R26.1 U1.50
NetR27_1: R27.1 U1.49
NetR28_1: R28.1 R29.2 U1.78 U3.5
NetR30_2: R30.2 U1.48
NetR31_1: R31.1 R32.1 U14.5
NetR33_1: R33.1 U13.9
NetR34_1: R34.1 U13.10
NetR36_1: R36.1 U15.4
NetR41_1: R41.1 U7.E3
NetR42_2: R42.2 U7.F5
NetR43_2: R43.2 U7.F6
NetR44_1: R44.1 U7.C5 U7.D4 U7.D5 U7.D6
NetR49_2: R49.2 U1.34
NetR50_2: R50.2 U17.5
NetU1_27: U1.27 U5.1
NetU1_28: U1.28 U5.2
NetU1_29: U1.29 U5.3
NetU1_31: U1.31 U5.7
NetU1_32: U1.32 U5.6
NetU1_33: U1.33 U5.5
NetU1_79: U1.79 U3.1
NetU8_55: U8.55 U9.5
NetU8_56: U8.56 U9.6
NetU15_6: U15.6 Y4.4
NetY5_2: Y5.2 Y5.4
NFC_IQR: U16.27
nTRST: U8.17
RF_A: C72.2 C73.2 U13.38
RF_BG: FL1.1 U13.2
RF_LR_BUSY: U15.25
RF_LR_nRESET: R45.2 U15.20
RF_SPI_CLK: U1.8 U15.23 U16.30
RF_SPI_CS0: U1.10
RF_SPI_CS1: U1.11 U15.24
RF_SPI_CS2: U16.29
RF_SPI_MISO: U1.7 U15.21 U16.32
RF_SPI_MOSI: U1.6 U15.22 U16.31
RFI1: C99.1 C104.2 U16.22
RFI2: C107.1 C112.2 U16.23
RFI_HF: L19.2 U15.31
RFI_LF: L7.1 U15.29
RFO1: L20.1 U16.13
RFO2: L21.1 U16.15
RFO_HF: L13.2 L15.1 U15.32
RFO_LF1: L9.1 L12.2 U15.27 U15.28
RJOY_VRx: U11.2
RJOY_VRy: U11.3
SDIO1_CD: microSD.11 U1.87
SDIO1_CLK: D4.1 microSD.5 R18.2 U1.84
SDIO1_CMD: D3.1 microSD.3 R17.2 U1.86
SDIO1_D0: D8.1 microSD.7 R22.2 U1.80
SDIO1_D1: D7.1 microSD.8 R21.2 U1.81
SDIO1_D2: D6.1 microSD.1 R20.2 U1.82
SDIO1_D3: D5.1 microSD.2 R19.2 U1.83
SHDN_0V9FPGA: R48.1 U4.9 U11.11
Slow_CLK: U13.34 Y2.3
TCK: U6.K3 U8.12
TDI: U6.K5 U8.13
TDO: U6.J4 U8.14
TMS: U6.K4 U8.15
UART_RX_P4: U1.16 U8.33
UART_RX_Ti60: U8.46
UART_TX_P4: U1.15 U8.32
UART_TX_Ti60: U8.42
UART_TX_TRACE: U13.28
USB_DM: J1.A7 J1.B7 R43.1 U2.2
USB_DP: J1.A6 J1.B6 R42.1 U2.1
USB_ESP_M: R27.2 U2.6
USB_ESP_P: R26.2 U2.7
Util_nRESET: U1.1 U11.15 U12.20
Util_SCL: R16.1 U1.13 U7.B6 U10.17 U11.14 U12.23 U18.19
Util_SDA: R15.1 U1.14 U7.C6 U10.19 U11.13 U12.22 U18.18
VBAT: C3.1 C12.2 C96.1 P1.1 R44.2 U7.C4
VBUS: C18.2 FB1.2 U7.B1 U7.B2
VDD4_1V8: C20.2 C22.2 C43.2 C44.2 D1.2 R17.1 R18.1 R19.1 R20.1 R21.1 R22.1 U1.74 U1.85
VDD_FLASH: C29.2 C30.2 C31.2 U1.30 U1.71 U5.8
VDD_PSRAM: C34.2 C35.2 U1.59 U1.67 U1.72
VR_PA: C83.2 C84.2 C86.1 L12.1 L13.1 U15.1
VSYS: C6.2 C7.2 C13.2 C117.2 C118.2 L2.1 U4.5 U4.11 U4.22 U7.E4 U7.E5 U7.E6
WiFi_BLE_nRESET: R46.2 U13.33
WiFi_SDIO2_CLK: U1.22 U13.19
WiFi_SDIO2_CMD: U1.23 U13.18
WiFi_SDIO2_D0: U1.17 U13.24
WiFi_SDIO2_D1: U1.18 U13.23
WiFi_SDIO2_D2: U1.19 U13.22
WiFi_SDIO2_D3: U1.20 U13.21
WiFi_SWCLK: U13.26
WiFi_SWDIO: U13.27
pads on no net: ALIVE.0 C50.1 C50.2 C51.1 C51.2 C56.1 C56.2 D2.1 D2.2 D2.3 D2.4 E1.2 E1.3 E1.4 E1.5 J1.A8 J1.B8 J4.1 J4.2 J4.4 J4.5 J4.11 J4.12 J4.13 J4.14 J4.15 J4.16 J4.23 J4.24 J4.25 J4.26 J4.28 J5.2@208.5,29.5 J5.3@208.5,26.5 J8. J8.5 J8.6 L2.2 L17.1 L22.2 LED4.0 LED5.0 LED5.1 LED5.2 LED6.0 LED6.1 LED6.2 microSD.10 microSD.12 P1.P1 P1.P2 R37.2 SW1.0 SW1.1 SW1.4 SW2.3 U1.54 U1.66 U1.68 U1.69 U1.70 U2.8 U4.1 U4.2 U4.3 U4.7 U4.10 U4.13 U4.14 U4.19 U5.9 U6.A1 U6.A2 U6.A3 U6.A4 U6.A5 U6.A6 U6.A7 U6.A8 U6.A9 U6.A10 U6.B1 U6.B2 U6.B3 U6.B4 U6.B5 U6.B6 U6.B7 U6.B8 U6.B9 U6.B10 U6.C1 U6.C2 U6.C3 U6.C4 U6.C5 U6.C6 U6.C7 U6.C8 U6.C9 U6.C10 U6.D1 U6.D2 U6.D3 U6.D4 U6.D5 U6.D6 U6.D7 U6.D8 U6.D9 U6.D10 U6.E1 U6.E2 U6.E3 U6.E4 U6.E5 U6.E6 U6.E7 U6.E8 U6.E9 U6.E10 U6.F1 U6.F2 U6.F3 U6.F4 U6.F5 U6.F6 U6.F7 U6.F8 U6.F9 U6.F10 U6.G1 U6.G2 U6.G3 U6.G4 U6.G5 U6.G6 U6.G7 U6.G8 U6.G9 U6.G10 U6.H1 U6.H2 U6.H3 U6.H4 U6.H5 U6.H6 U6.H7 U6.H8 U6.H9 U6.H10 U6.J1 U6.J2 U6.J3 U6.J5 U6.J6 U6.J7 U6.J8 U6.J9 U6.J10 U6.K1 U6.K2 U6.K6 U6.K7 U6.K8 U6.K9 U6.K10 U7.A1 U7.A2 U7.A3 U7.A4 U7.B4 U7.C3 U8.1 U8.3 U8.4 U8.6 U8.10 U8.11 U8.16 U8.18 U8.19 U8.20 U8.27 U8.28 U8.29 U8.30 U8.34 U8.35 U8.36 U8.37 U8.38 U8.39 U8.40 U8.47 U8.48 U8.49 U8.50 U8.51 U8.52 U8.53 U8.54 U9.1 U9.2 U9.3 U9.7 U9.8 U10.1 U10.3 U10.5 U10.6 U10.7 U10.8 U10.9 U10.10 U10.11 U10.12 U10.13 U10.15 U10.16 U10.18 U10.20 U10.21 U10.22 U10.23 U10.24 U11.1 U11.6 U11.7 U11.8 U11.9 U11.16 U12.1 U12.14 U12.15 U12.16 U12.17 U12.18 U12.21 U13.8 U13.15 U13.36 U15.2 U15.3 U15.5 U15.7 U15.8 U15.9 U15.10 U15.11 U15.12 U15.13 U15.17 U15.18 U15.19 U15.26 U16.1 U16.2 U16.3 U16.4 U16.5 U16.7 U16.8 U16.9 U16.10 U16.11 U16.14 U16.24 U16.25 U16.28 U18.2 U18.3 U18.5 U18.6 U18.7 U18.8 U18.9 U18.11 U18.12 U18.13 U18.20 Y2.1 Y5.1 Y5.3

## Silkscreen, mask and mechanical layers (free items; w line width, h text height)
Top Overlay:
  the board outline again, w0.254

## Text inside footprints (layer, text, board x,y; h text height)
C1: Top Overlay "REFDES" at 278.634,76.277 h1.27 r90; Top Overlay "RefDes" at 278.634,76.595 h1.27 r90; Mechanical 13 "RefDes2" at 278.634,76.277 h1.27 r90
C3: Top Overlay "REFDES" at 124.635,76.277 h1.27 r90; Top Overlay "RefDes" at 124.635,76.595 h1.27 r90; Mechanical 13 "RefDes2" at 124.635,76.277 h1.27 r90
C4: Top Overlay "REFDES" at 228.135,76.277 h1.27 r90; Top Overlay "RefDes" at 228.135,76.595 h1.27 r90; Mechanical 13 "RefDes2" at 228.135,76.277 h1.27 r90
C9: Top Overlay "REFDES" at 168.635,76.277 h1.27 r90; Top Overlay "RefDes" at 168.635,76.595 h1.27 r90; Mechanical 13 "RefDes2" at 168.635,76.277 h1.27 r90
C96: Top Overlay "REFDES" at 113.635,33.277 h1.27 r90; Top Overlay "RefDes" at 113.635,33.595 h1.27 r90; Mechanical 13 "RefDes2" at 113.635,33.277 h1.27 r90
C98: Top Overlay "REFDES" at 242.635,25.777 h1.27 r90; Top Overlay "RefDes" at 242.635,26.095 h1.27 r90; Mechanical 13 "RefDes2" at 242.635,25.777 h1.27 r90
C103: Top Overlay "REFDES" at 209.135,25.777 h1.27 r90; Top Overlay "RefDes" at 209.135,26.095 h1.27 r90; Mechanical 13 "RefDes2" at 209.135,25.777 h1.27 r90
C105: Top Overlay "REFDES" at 194.635,25.777 h1.27 r90; Top Overlay "RefDes" at 194.635,26.095 h1.27 r90; Mechanical 13 "RefDes2" at 194.635,25.777 h1.27 r90
C109: Top Overlay "REFDES" at 166.635,25.777 h1.27 r90; Top Overlay "RefDes" at 166.635,26.095 h1.27 r90; Mechanical 13 "RefDes2" at 166.635,25.777 h1.27 r90
C122: Top Overlay "REFDES" at 178.635,63.277 h1.27 r90; Top Overlay "RefDes" at 178.635,63.595 h1.27 r90; Mechanical 13 "RefDes2" at 178.635,63.277 h1.27 r90
C123: Top Overlay "REFDES" at 185.635,63.277 h1.27 r90; Top Overlay "RefDes" at 185.635,63.595 h1.27 r90; Mechanical 13 "RefDes2" at 185.635,63.277 h1.27 r90
C128: Top Overlay "REFDES" at 113.635,48.277 h1.27 r90; Top Overlay "RefDes" at 113.635,48.595 h1.27 r90; Mechanical 13 "RefDes2" at 113.635,48.277 h1.27 r90
D3: Top Overlay "RefDes" at 310.634,40.095 h1.27 r90; Top Overlay "REFDES" at 310.634,39.777 h1.27 r90; Mechanical 13 "RefDes2" at 310.634,39.777 h1.27 r90
D4: Top Overlay "RefDes" at 314.634,40.095 h1.27 r90; Top Overlay "REFDES" at 314.634,39.777 h1.27 r90; Mechanical 13 "RefDes2" at 314.634,39.777 h1.27 r90
D5: Top Overlay "RefDes" at 319.134,40.095 h1.27 r90; Top Overlay "REFDES" at 319.134,39.777 h1.27 r90; Mechanical 13 "RefDes2" at 319.134,39.777 h1.27 r90
D6: Top Overlay "RefDes" at 323.134,40.095 h1.27 r90; Top Overlay "REFDES" at 323.134,39.777 h1.27 r90; Mechanical 13 "RefDes2" at 323.134,39.777 h1.27 r90
D7: Top Overlay "RefDes" at 327.634,40.095 h1.27 r90; Top Overlay "REFDES" at 327.634,39.777 h1.27 r90; Mechanical 13 "RefDes2" at 327.634,39.777 h1.27 r90
D8: Top Overlay "RefDes" at 332.134,40.095 h1.27 r90; Top Overlay "REFDES" at 332.134,39.777 h1.27 r90; Mechanical 13 "RefDes2" at 332.134,39.777 h1.27 r90
D12: Top Overlay "RefDes" at 120.135,63.095 h1.27 r90; Top Overlay "REFDES" at 120.135,62.777 h1.27 r90; Mechanical 13 "RefDes2" at 120.135,62.777 h1.27 r90
D13: Top Overlay "RefDes" at 113.635,26.095 h1.27 r90; Top Overlay "REFDES" at 113.635,25.777 h1.27 r90; Mechanical 13 "RefDes2" at 113.635,25.777 h1.27 r90
D14: Top Overlay "RefDes" at 119.135,26.095 h1.27 r90; Top Overlay "REFDES" at 119.135,25.777 h1.27 r90; Mechanical 13 "RefDes2" at 119.135,25.777 h1.27 r90
J1: Mechanical 13 "PCB Edge" at 25.01,34.04 h0.81 r270
J4: Top Overlay "RefDes" at 94.2,30.075 h1.27 r180; Top Overlay "REFDES" at 94.518,30.075 h1.27 r180; Mechanical 13 "RefDes2" at 94.518,30.075 h1.27 r180
J8: Mechanical 13 "PCB EDGE" at 27.25,34.75 h1 r270
U4: Top Overlay "*" at 67.847,35.865 h1.27; Top Overlay "RefDes" at 69.345,34.365 h1.27; Top Overlay "REFDES" at 69.027,34.365 h1.27; Mechanical 13 "*" at 69.383,35.865 h1.27; Mechanical 13 "RefDes2" at 69.027,34.365 h1.27
U7: Top Overlay "6" at 45.135,64.998 h1.27 r90; Top Overlay "1" at 42.635,64.998 h1.27 r90; Top Overlay "F" at 40.342,60.865 h1.27; Top Overlay "A" at 40.342,63.365 h1.27; Mechanical 13 "6" at 45.135,64.998 h1.27 r90; Mechanical 13 "1" at 42.635,64.998 h1.27 r90; Mechanical 13 "F" at 40.342,60.865 h1.27; Mechanical 13 "A" at 40.342,63.365 h1.27; Bottom Overlay "6" at 43.865,64.998 h1.27 r270; Bottom Overlay "1" at 41.365,64.998 h1.27 r270; Bottom Overlay "F" at 40.977,60.865 h1.27; Bottom Overlay "A" at 40.977,63.365 h1.27
U8: Top Overlay "REFDES" at 44.777,39.865 h1.27; Top Overlay "RefDes" at 45.095,39.865 h1.27; Top Overlay "*" at 41.641,43.365 h1.27; Mechanical 13 "RefDes2" at 44.777,39.865 h1.27; Mechanical 13 "*" at 43.19,43.365 h1.27
U11: Top Overlay "*" at 81.365,42.409 h1.27 r270; Mechanical 13 "*" at 81.365,40.868 h1.27 r270
U15: Top Overlay "1" at 95.815,37.14 h0.5
U16: Top Overlay "REFDES" at 99.385,47.826 h1.27 r90; Top Overlay "RefDes" at 99.385,48.144 h1.27 r90; Top Overlay "*" at 97.385,46.188 h1.27 r90; Mechanical 13 "RefDes2" at 99.385,47.826 h1.27 r90; Mechanical 13 "*" at 97.385,47.737 h1.27 r90
U18: Top Overlay "REFDES" at 46.435,27.83 h1.27 r90; Top Overlay "RefDes" at 46.435,28.147 h1.27 r90; Top Overlay "*" at 45.435,27.195 h1.27 r90; Mechanical 13 "RefDes2" at 46.435,27.83 h1.27 r90; Mechanical 13 "*" at 45.435,28.744 h1.27 r90